# Altium PCB station_de_charge_PCB1_r.PcbDoc
Units mm, origin at the board's own origin, x right, y up, seen from the top; angles counter-clockwise.
Board outline 60.5 x 35 mm, 2 copper layers (Top Layer, Bottom Layer); 11 components, 28 nets, 22 pads, 0 vias.
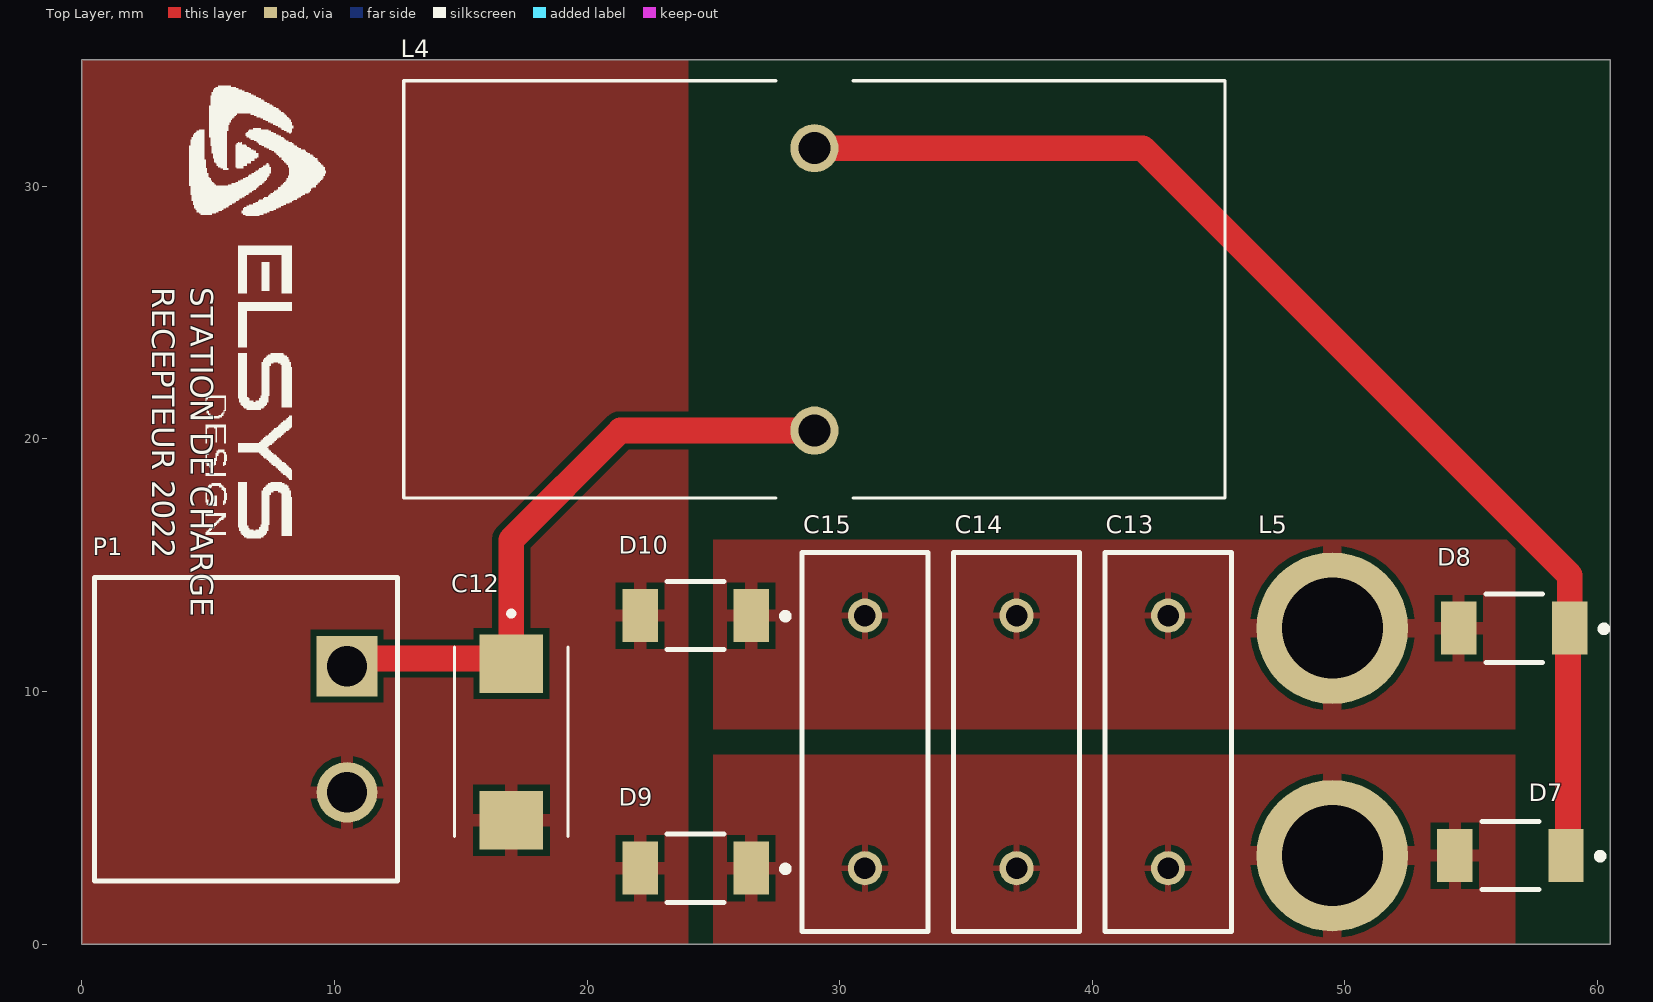
[diagram p0: Top Layer view]
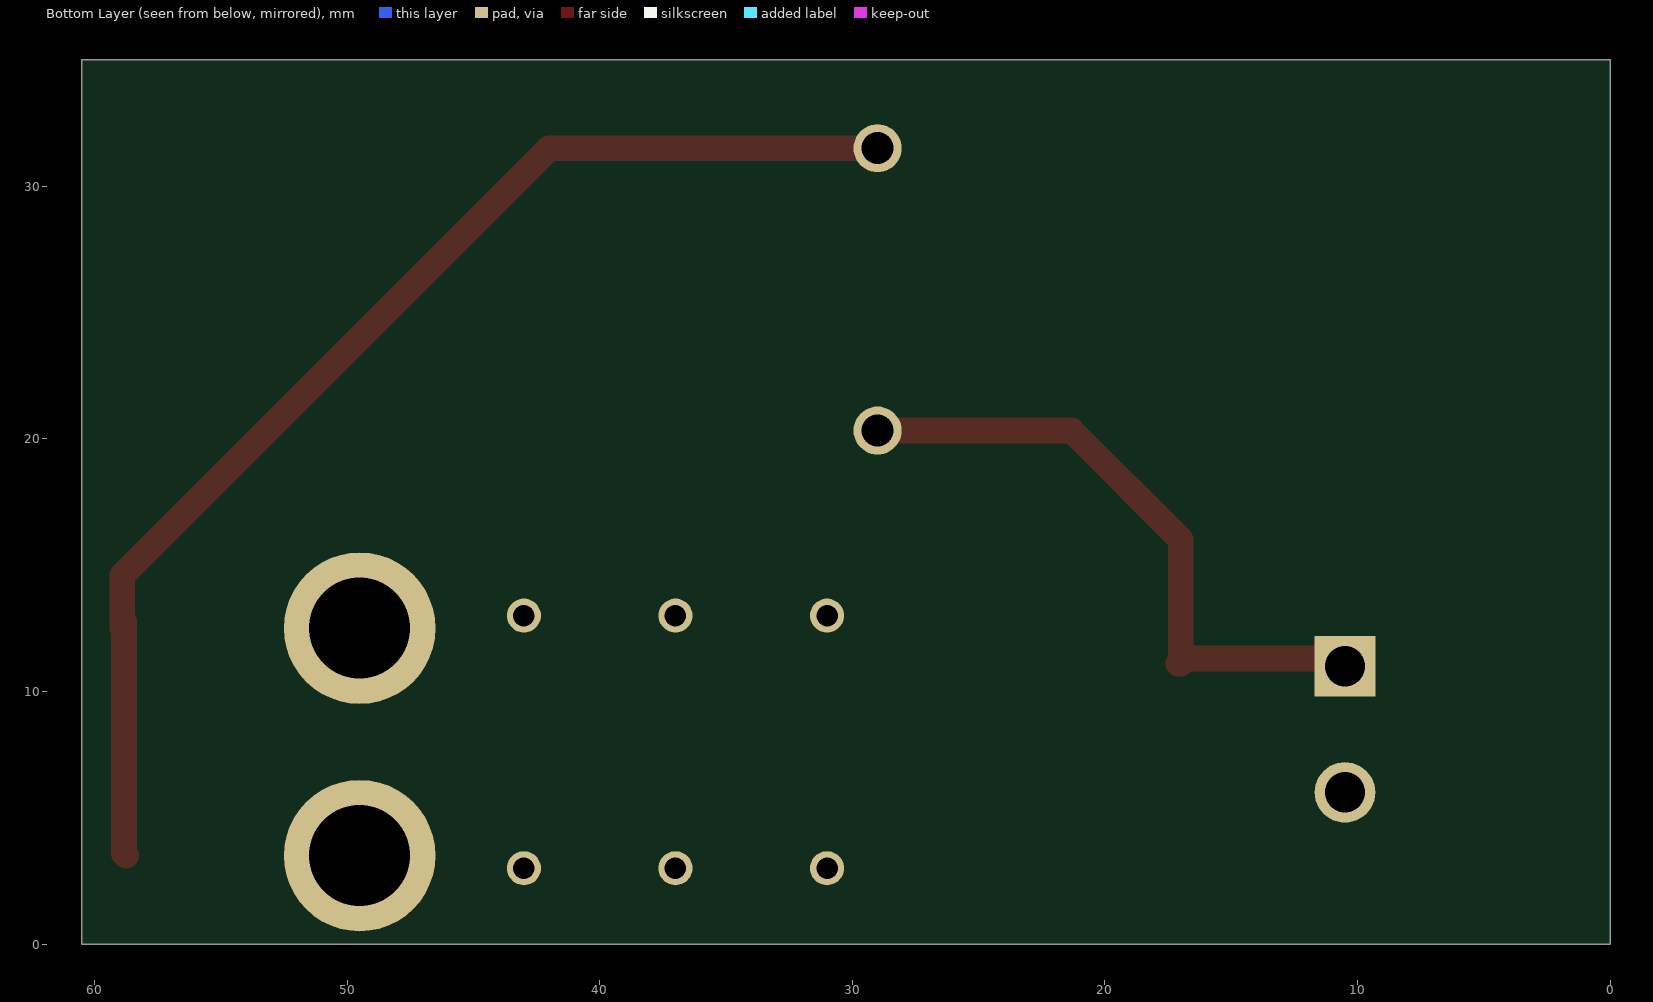
[diagram p1: Bottom Layer view, seen from below]
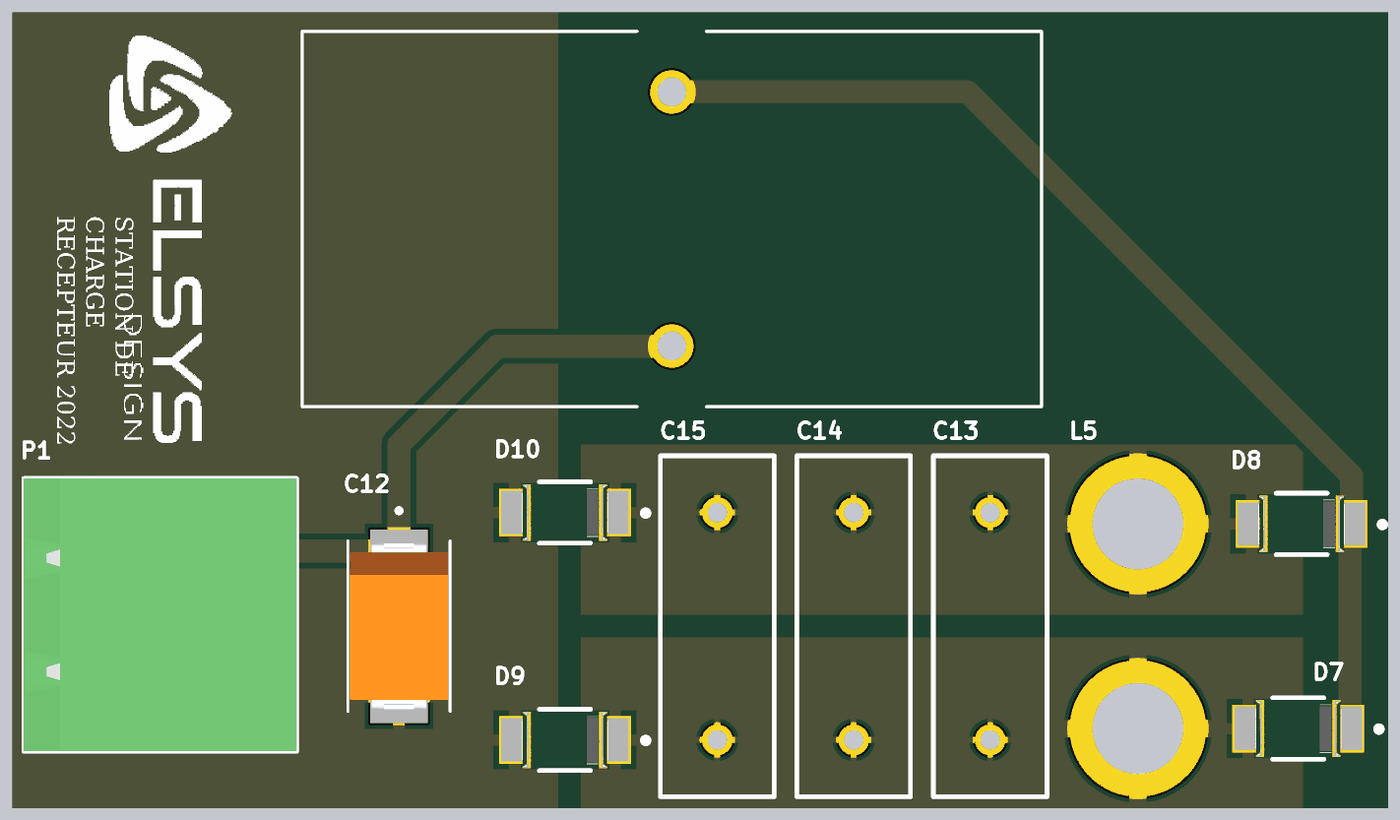
[diagram p2: 3D render of the assembled board from above, using the file's embedded part models]

## Layer stack, top to bottom
Top Solder: solder mask 0.0102, Solder Resist, Dk 3.5
Top Layer: signal copper 0.0356
Dielectric 1: dielectric 0.32, FR-4, Dk 4.8
Bottom Layer: signal copper 0.0356
Bottom Solder: solder mask 0.0102, Solder Resist, Dk 3.5

## Board outline
0,0 0,35 60.5,35 60.5,0

## Design rules (kind name [scope] priority, off if disabled: settings)
Clearance [All] p1: gap=0.254 ignorepadtopadclearanceinfootprint=FALSE except(0: Arc-Hole Track-Hole SMDPad-Hole THPad-Hole Via-Hole Fill-Hole Poly-Hole Region-Hole Text-Hole)
MinimumSolderMaskSliver [All] p1: minsoldermaskwidth=0.008
PolygonConnect [All] p1: connectstyle=Relief reliefconductorwidth=0.254 reliefentries=4 polygonreliefangle="90 Angle" airgapwidth=0.254
RoutingVias [All] p1: holewidth=0.711 width=1.27 viastyle="Through Hole" minholewidth=0.711 minwidth=1.27 maxholewidth=0.711 maxwidth=1.27
SolderMaskExpansion [All] p1: expansion=0.102 istentingtop=FALSE
Width [All] p1: maxlimit=2.54 minlimit=0.254 preferedwidth=0.254
29 further rules are at their usual default settings.

## Components (designator, comment, footprint, x,y, rotation, side; value= is the part's Value field where it differs from the comment)
C12 "22µf" CAPPM7343X310N 17,8 r270 top
C13 "22nF 630VDC 10%" R60PF22205040K 43,3 r90 top
C14 "22nF 630VDC 10%" R60PF22205040K 37,3 r90 top
C15 "22nF 630VDC 10%" R60PF22205040K 31,3 r90 top
D7 "PMEG4050EP,115" FP-SOD128-MFG 58.75,3.5 r180 top
D8 "PMEG4050EP,115" FP-SOD128-MFG 58.9,12.5 r180 top
D9 "PMEG4050EP,115" FP-SOD128-MFG 26.5,3 r180 top
D10 "PMEG4050EP,115" FP-SOD128-MFG 26.5,13 r180 top
L4 "2212-V-RC" IND_HCTI-220-5.8 29,31.5 r270 top
L5 "loop" LOOP 49.5,3.5 r180 top
P1 "691313710002" 691313710002 6.5,8.5 r270 top

## Footprints (in the part's own frame and the unit in brackets; to place one, negate y for a bottom-side part, rotate by r counter-clockwise, add the part's x,y. Pads: shape width x height; smd on the part's side, far side on the other; paste and mask are expansions set on the pad)
691313710002 [mm] "5.00mm - Closed Horizhontal PCB Header - -02p"
  rect 2.4x2.4 hole 1.6: 1(-2.5,4)
  round 2.4 hole 1.6: 2(2.5,4)
  silkscreen extent -6,-6 6,6, body extent -6,-6 6,6, height 8.55
CAPPM7343X310N [mm]
  rect 2.31x2.52 smd: 1(-3.1,0) 2(3.1,0)
  silkscreen extent -5.18,-2.25 3.75,2.25, body extent -3.65,-2.15 3.65,2.15, height 3.11
FP-SOD128-MFG [mm]
  rect 1.4x2.1 smd paste-1000 mask+0: 1(0,0) 2(4.4,0)
  silkscreen extent -1.48,-1.35 3.32,1.35, body extent -0.9,-1.7 5.3,1.7, height 0.25
IND_HCTI-220-5.8 [mil]
  round 75 hole 50: 1(0,0) 2(440,0)
  silkscreen extent -105,-640 545,640
LOOP [mm]
  round 6 hole 4: 1(0,0) 2(0,-9)
R60PF22205040K [mm]
  round 1.35 hole 0.85: 1(0,0) 2(10,0)
  silkscreen extent -2.5,-2.5 12.5,2.5

## Part data
C12: library part TCJD226M050R0090E, "Cap Tant Polymer 22uF 50VDC D CASE 20% (7.3 X 4.3 X 2.9mm) SMD 7343-31 0.09 Ohm 125C Automotive T/R", Manufacturer="Kyocera AVX", Supplier Part Number 1=581-TCJD226M050R090E, Manufacturer Part Number=TCJD226M050R0090E, Pricing 1="1=3,75000, 10=3,03000, 50=2,65000, 100=2,32000, 500=2,03000, 1000=2,03000, 10000=2,03000 (USD)", RoHS=Yes, Stock 1=3975, Supplier 1=Mouser
C13 C14 C15: library part R60PF22205040K, "Cap Film 0.022uF 630V PET 10%( 13 X 4 X 9mm) Radial Wound 10mm 105C Automotive Bag", Capacitance=22nF, Case/Package=Radial, Dielectric=PET, Manufacturer=KEMET, Max Operating Temperature=105°C, Min Operating Temperature=-55°C, Supplier Part Number 1=80-R60PF22205040K, Tolerance=10%, Voltage Rating=630V, Voltage Rating (AC)=220V, Category="Film Capacitors", ComponentLink1Description=http://www.farnell.com/datasheets/1959821.pdf?src-supplier=Farnell, ComponentLink1URL=http://www.farnell.com/datasheets/1959821.pdf?src-supplier=Farnell, ComponentLink2Description=http://www.farnell.com/datasheets/1959821.pdf?src-supplier=Element14, ComponentLink2URL=http://www.farnell.com/datasheets/1959821.pdf?src-supplier=Element14, ComponentLink3Description=http://www.kemet.com/docfinder?Partnumber=R60&src-supplier=Digi-Key, ComponentLink3URL=http://www.kemet.com/docfinder?Partnumber=R60&src-supplier=Digi-Key, Dielectric Material=PET, Height - Seated (Max)=0.394inch, Lead Pitch=0.394inch, Length=0.512inch, Manufacturer Part Number=R60PF22205040K, Mount="Through Hole", Packaging=Bulk, Pricing 1="1=0,67000, 10=0,49600, 50=0,39700, 100=0,34000, 1000=0,22700, 10000=0,21200 (USD)", REACH SVHC="No SVHC", RoHS=Yes, RoHS Compliant=Yes, Stock 1=1035, Supplier 1=Mouser, Termination="PC Pins", Voltage Rating (DC)=630V, Width=0.157inch
D7 D8 D9 D10: "DIODE SCHOTTKY 40V 5A SOD128", Manufacturer=Nexperia, Supplier Part Number 1=771-PMEG4050EP115, Category="Rectifier Diodes", ComponentLink1Description=http://www.farnell.com/datasheets/609330.pdf?src-supplier=Farnell, ComponentLink1URL=http://www.farnell.com/datasheets/609330.pdf?src-supplier=Farnell, ComponentLink2Description=http://www.farnell.com/datasheets/609330.pdf?src-supplier=Element14, ComponentLink2URL=http://www.farnell.com/datasheets/609330.pdf?src-supplier=Element14, ComponentLink3Description=https://www.mouser.com/ds/2/302/PMEG4050EP-1151641.pdf?src-supplier=Mouser, ComponentLink3URL=https://www.mouser.com/ds/2/302/PMEG4050EP-1151641.pdf?src-supplier=Mouser, ComponentLink4Description=http://www.farnell.com/datasheets/609330.pdf?src-supplier=Newark, ComponentLink4URL=http://www.farnell.com/datasheets/609330.pdf?src-supplier=Newark, ComponentLink5Description=https://assets.nexperia.com/documents/data-sheet/PMEG4050EP.pdf?src-supplier=Digi-Key, ComponentLink5URL=https://assets.nexperia.com/documents/data-sheet/PMEG4050EP.pdf?src-supplier=Digi-Key, Manufacturer Part Number=PMEG4050EP,115, Pricing 1="1=0,55000, 10=0,47100, 50=0,47100, 100=0,35200, 1000=0,21400, 10000=0,17700 (USD)", RoHS=Yes, RoHS Compliant=Yes, Stock 1=216619, Supplier 1=Mouser
L4: "Inductor High Current Toroid 100uH/64uH 15% 1KHz 4.4A 56mOhm DCR RDL", Case/Package=Radial, Current Rating=4.4A, DC Resistance (DCR)=56mR, Inductance=100uH, Inductance Tolerance=15%, Manufacturer="Bourns JW Miller", Max Operating Temperature=105°C, Min Operating Temperature=-55°C, Package Quantity=77, Supplier Part Number 1=542-2212-V-RC, Test Frequency=1kHz, Category="Fixed Inductors", ComponentLink1Description=https://datasheet.ciiva.com/11798/0900766b80fa5688-11798051.pdf?src-supplier=RSComponents, ComponentLink1URL=https://datasheet.ciiva.com/11798/0900766b80fa5688-11798051.pdf?src-supplier=RSComponents, ComponentLink2Description=https://datasheet.ciiva.com/6690/2200-series-6690646.pdf?src-supplier=Digi-Key, ComponentLink2URL=https://datasheet.ciiva.com/6690/2200-series-6690646.pdf?src-supplier=Digi-Key, ComponentLink3Description=https://datasheet.ciiva.com/28654/2200-series-28654982.pdf?src-supplier=Element14, ComponentLink3URL=https://datasheet.ciiva.com/28654/2200-series-28654982.pdf?src-supplier=Element14, ComponentLink4Description=https://datasheet.ciiva.com/3076/2200-series-3076522.pdf?src-supplier=Avnet, ComponentLink4URL=https://datasheet.ciiva.com/3076/2200-series-3076522.pdf?src-supplier=Avnet, Contact Plating=Tin, Core Material=Ferrite, DC Current=4.4A, Depth=13.97mm, Diameter=0.95inch, Height - Seated (Max)=0.55inch, Lead Diameter=0.86mm, Lead Free="Lead Free", Lead Pitch=11.176mm, Lead/Base Style=Radial, Manufacturer Part Number=2212-V-RC, Max DC Current=4.4A, Military Standard=Not, Mount="Through Hole,Radial", Number of Pins=2, Packaging=Bulk, Pricing 1="1=4,88000, 10=4,48000, 50=3,72000, 100=2,93000, 1000=2,93000, 10000=2,93000 (USD)", Radiation Hardening=No, REACH SVHC="No SVHC", RMS Current (Irms)=4.4A, RoHS=Yes, RoHS Compliant=Yes, Series=2200, Shielding=Shielded, Stock 1=1501, Supplier 1=Mouser, Termination=Radial, Tolerance=15%, Width=0.55inch
P1: library part CMP-1502-02048-1, "Serie 3137 - 5.00mm Close Horizontal PCB Header WR-TBL, 2 pin", Manufacturer="Wurth Elektronik", Operating Temperature=-40to105degC, Datasheet URL=http://katalog.we-online.de/em/datasheet/6913137100xx.pdf, Gender=Male, Manufacturer URL=http://www.we-online.de, Mounting Technology=THT, Package Reference=691313710002, Packaging=Box, Part Number=691313710002, Pin Number=2, Pitch=5.00mm, Publisher=WurthElektronik

## Nets (pads, with @x,y where several pads share a name; then routed paths per layer and width w, separated by ;. In a path a pad name is that pad's centre, name@x,y a point inside that pad or via, vN(x,y) a via of type N, cw(c..) or ccw(c..) an arc to the next point about the centre after c; other vN are vias at no path point)
+12V: 
A: 
B: 
GND: C12.2 D9.2 D10.2 P1.2
NetC1_1: 
NetC4_1: 
NetC4_2: 
NetC5_2: 
NetC7_2: 
NetC12_1: C12.1 L4.2 P1.1 | length 27.7
  Top Layer w1.016: C12.1@16.7,11.3 11.192,11.3 P1.1@11.05,11.442 ; C12.1@17.105,11.1 C12.1 17,16 21.324,20.324 L4.2 ; P1.1 10.608,11 P1.1@11.05,11.442 ; P1.1 P1.1@11.05,11.55 ; P1.1 P1.1@11.05,11.55 ; P1.1 P1.1@11.05,11.55 ; P1.1@11.05,11.442 P1.1@11.05,11.55
NetC13_1: C13.1 C14.1 C15.1 D7.2 D9.1 L5.1
NetC13_2: C13.2 C14.2 C15.2 D8.2 D10.1 L5.2
NetD1_2: 
NetD2_2: 
NetD3_2: 
NetD4_2: 
NetD5_1: 
NetD5_2: 
NetD6_1: 
NetD6_2: 
NetD7_1: D7.1 D8.1 L4.1 | length 48.4
  Top Layer w1.016: L4.1 42,31.5 58.9,14.6 D8.1 ; D7.1 58.825,3.575 58.825,12.775 D8.1@58.9,12.85
NetJ1_1: 
NetJ1_2: 
NetJ3_1: 
NetJ4_1: 
NetQ3_1: 
NetQ4_2: 
NetQ9_2: 

## Polygon pours and split planes (outlines as drawn)
NetC13_2 on Top Layer "NETC13_2_L01_P001" (solid, pour order 1): 25,8.5 56.75,8.5 56.75,16 25,16
NetC13_1 on Top Layer "NETC13_1_L01_P000" (solid, pour order 0): 25,7.5 56.75,7.5 56.75,0 25,0
GND on Top Layer "GND_L01_P002" (solid, pour order 2): 0,35 24,35 24,0 0,0

## Silkscreen, mask and mechanical layers (free items; w line width, h text height)
Top Overlay:
  drawing of 16 lines, arcs and shapes, not listed
  text "STATION DE CHARGE / RECEPTEUR 2022" at 2.5,26 h1.52 r270